# Altium PCB Tag.PcbDoc
Units mil, origin at the board's own origin, x right, y up, seen from the top; angles counter-clockwise.
Board outline 2028.76 x 1150.6 mil, 4 copper layers (Top Layer, GND, MID, Bottom Layer), stack 42.101 mil thick; 25 components, 15 nets, 94 pads, 50 vias.
Unrouted connection lines stored in the file: 1.
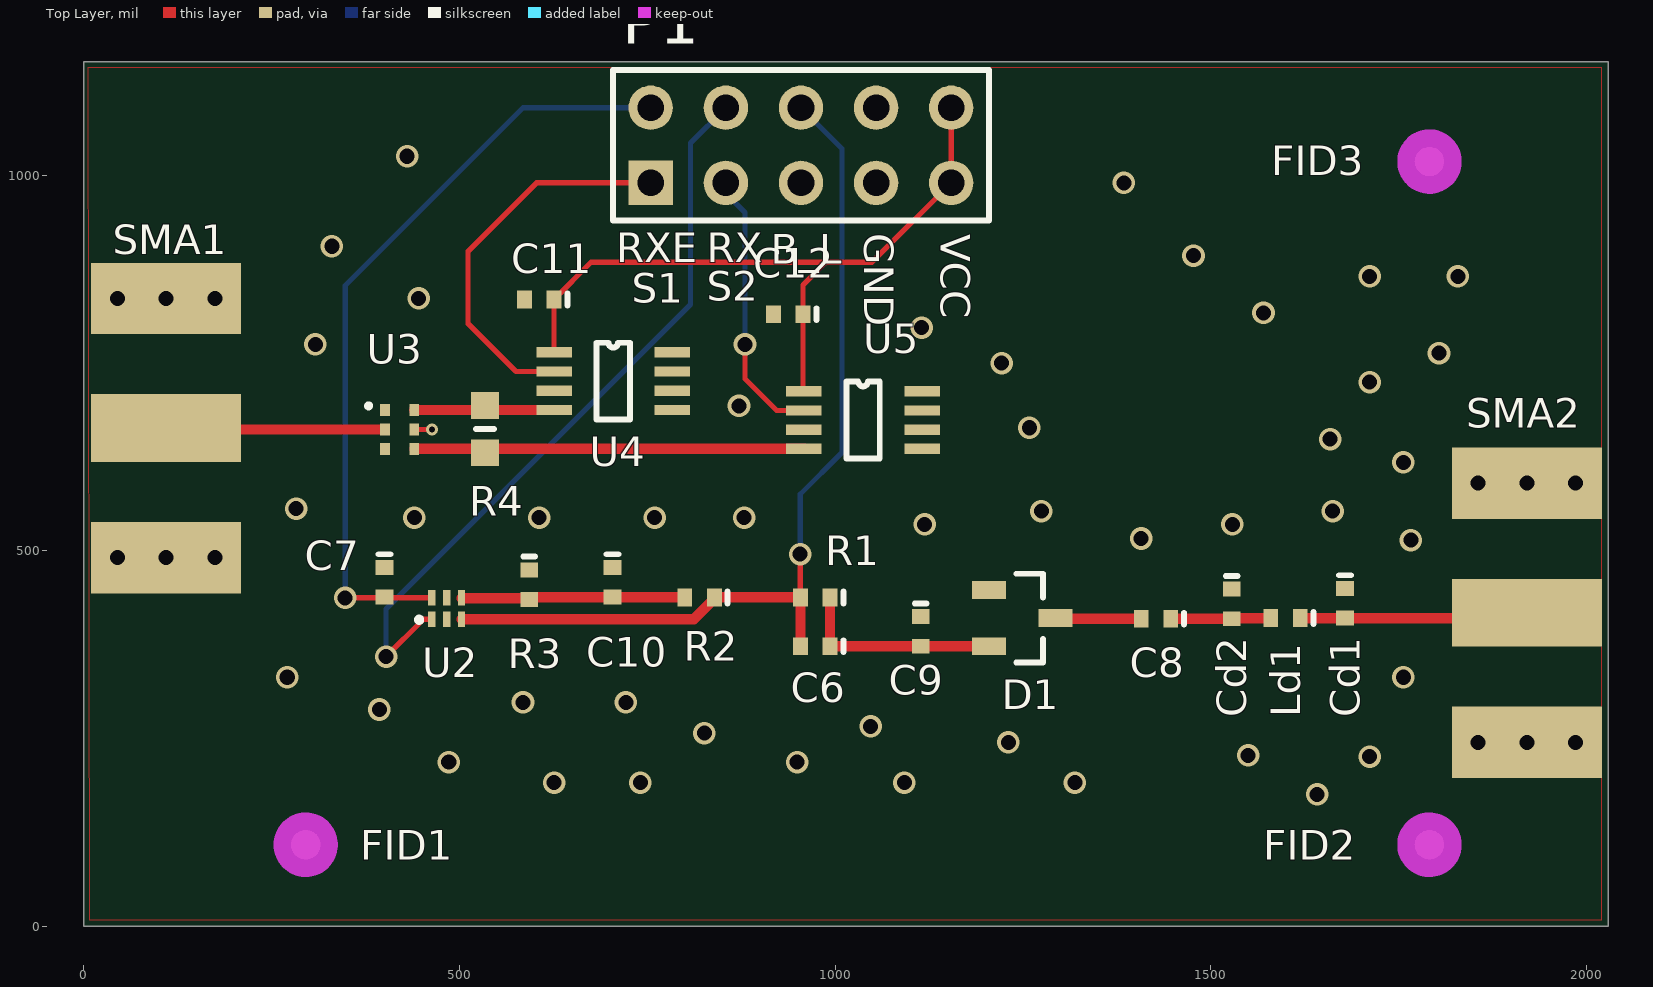
[diagram p0: Top Layer view]
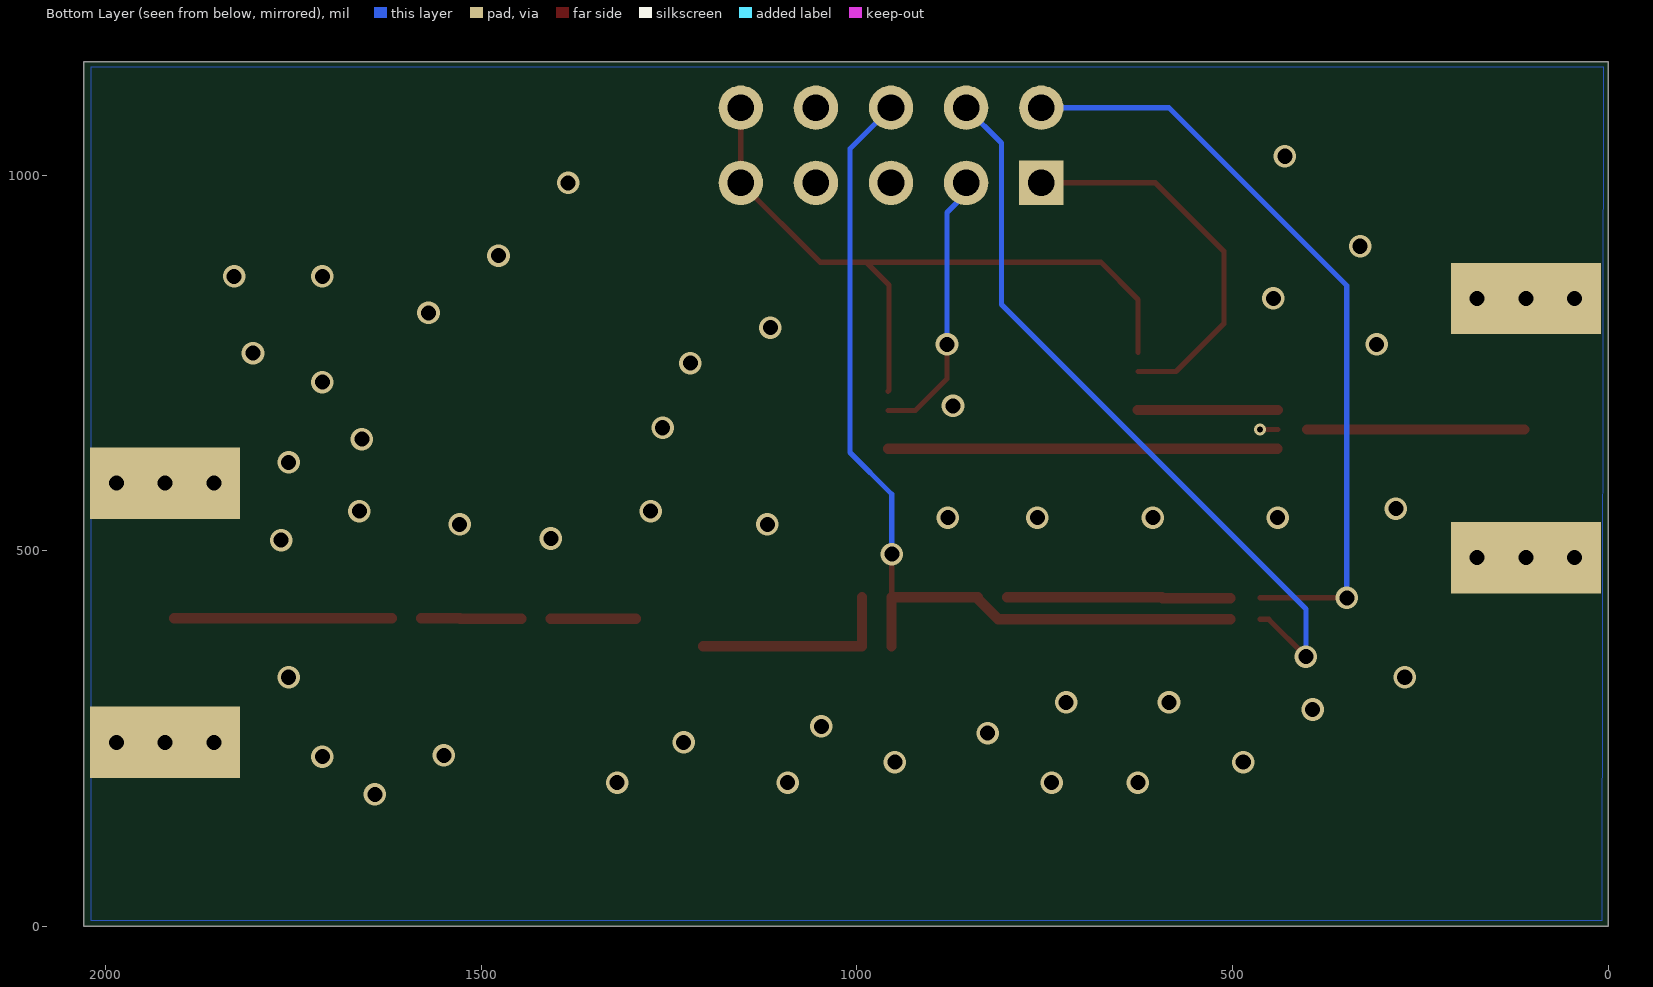
[diagram p1: Bottom Layer view, seen from below]

## Layer stack, top to bottom
Top Solder: solder mask 2, Solder Resist, Dk 3.5
Top Layer: signal copper 1.378
Dielectric 2: prepreg 4.016, PP, Dk 4.25
GND: signal copper 1.378
Dielectric 1: prepreg 28.557, TU768, Dk 4.45
MID: signal copper 1.378
Dielectric 3: prepreg 4.016, PP, Dk 4.25
Bottom Layer: signal copper 1.378
Bottom Solder: solder mask 2, Solder Resist, Dk 3.5

## Board outline
0,0 0,1150.6 2028.76,1150.6 2028.76,0

## Design rules (kind name [scope] priority, off if disabled: settings)
AssemblyTestPointUsage [All] p0: scope1count=1 scope1_0_kind=Board scope1_0_value=Board scope2count=1 scope2_0_kind=Board scope2_0_value=Board commentlength=0
AssemblyTestpoint [All] p0: scope1count=1 scope1_0_kind=Board scope1_0_value=Board scope2count=1 scope2_0_kind=Board scope2_0_value=Board commentlength=0
Clearance 信号线铺铜规则_1 [All] p0 off: scope1count=1 scope1_0_kind=Board scope1_0_value=Board scope2count=1 scope2_0_kind=NetClass scope2_0_value=RF2 commentlength=48 gap=16.25 // Protel DXP Scope 1 Expression Was: InPolygon
Clearance Clearance_1 [All] p0: scope1count=1 scope1_0_kind=Board scope1_0_value=Board scope2count=1 scope2_0_kind=Board scope2_0_value=Board commentlength=0 gap=5.9
Clearance 信号线铺铜规则 [All] p0 off: scope1count=1 scope1_0_kind=Board scope1_0_value=Board scope2count=1 scope2_0_kind=Board scope2_0_value=Board commentlength=48 gap=12 // Protel DXP Scope 1 Expression Was: InPolygon
Clearance Clearance_Keepouts [All] p0 off: scope1count=1 scope1_0_kind=Board scope1_0_value=Board scope2count=1 scope2_0_kind=Board scope2_0_value=Board commentlength=99 gap=0 // Protel DXP Scope 2 Expression Was: ((IsTrack Or IsArc) And Not InPoly) And IsFree and IsKeepOut
Clearance 信号线铺铜规则 [InPolygon] p1: gap=12 ignorepadtopadclearanceinfootprint=FALSE
Clearance 信号线铺铜规则_1 [InPolygon vs InNetClass('RF2')] p2: gap=16.25 ignorepadtopadclearanceinfootprint=FALSE
Clearance Clearance_Keepouts [((IsTrack Or IsArc) And Not InPoly) And IsFree and IsKeepOut vs ((IsTrack Or IsArc) And Not InPoly) And IsFree and IsKeepOut] p3: gap=0 ignorepadtopadclearanceinfootprint=FALSE
Clearance Clearance_1 [All] p4: gap=5.9 ignorepadtopadclearanceinfootprint=FALSE except(0: Arc-SMDPad Track-SMDPad)
ComponentClearance [All] p0: scope1count=1 scope1_0_kind=Board scope1_0_value=Board scope2count=1 scope2_0_kind=Board scope2_0_value=Board commentlength=0 gap=10 collisioncheckmode=3
DiffPairsRouting [All] p0: scope1count=1 scope1_0_kind=Board scope1_0_value=Board scope2count=1 scope2_0_kind=Board scope2_0_value=Board commentlength=0
FabricationTestPointUsage [All] p0: scope1count=1 scope1_0_kind=Board scope1_0_value=Board scope2count=1 scope2_0_kind=Board scope2_0_value=Board commentlength=0 valid=0 allowmultiple=FALSE
FabricationTestpoint [All] p0: scope1count=1 scope1_0_kind=Board scope1_0_value=Board scope2count=1 scope2_0_kind=Board scope2_0_value=Board commentlength=0 side=3 testpointundercomponent=TRUE minsize=40 maxsize=100 preferedsize=60 minholesize=0 maxholesize=40 preferedholesize=32 testpointgrid=1
FanoutControl Fanout_Default [All] p0: scope1count=1 scope1_0_kind=Board scope1_0_value=Board scope2count=1 scope2_0_kind=Board scope2_0_value=Board commentlength=30 // Fanout_Default (Default Rule)
FanoutControl Fanout_Small [All] p0 off: scope1count=1 scope1_0_kind=Board scope1_0_value=Board scope2count=1 scope2_0_kind=Board scope2_0_value=Board commentlength=84 // Protel DXP Scope 1 Expression Was: (CompPinCount < 5)   Fanout_Small (Default Rule)
FanoutControl Fanout_SOIC [All] p0 off: scope1count=1 scope1_0_kind=Board scope1_0_value=Board scope2count=1 scope2_0_kind=Board scope2_0_value=Board commentlength=71 // Protel DXP Scope 1 Expression Was: IsSOIC   Fanout_SOIC (Default Rule)
FanoutControl Fanout_LCC [All] p0 off: scope1count=1 scope1_0_kind=Board scope1_0_value=Board scope2count=1 scope2_0_kind=Board scope2_0_value=Board commentlength=69 // Protel DXP Scope 1 Expression Was: IsLCC   Fanout_LCC (Default Rule)
FanoutControl Fanout_BGA [All] p0 off: scope1count=1 scope1_0_kind=Board scope1_0_value=Board scope2count=1 scope2_0_kind=Board scope2_0_value=Board commentlength=69 // Protel DXP Scope 1 Expression Was: IsBGA   Fanout_BGA (Default Rule)
Height [All] p0: scope1count=1 scope1_0_kind=Board scope1_0_value=Board scope2count=1 scope2_0_kind=Board scope2_0_value=Board commentlength=0
HoleSize [All] p0: scope1count=1 scope1_0_kind=Board scope1_0_value=Board scope2count=1 scope2_0_kind=Board scope2_0_value=Board commentlength=0 absolutevalues=TRUE maxlimit=100 minlimit=1 maxpercent=80.000 minpercent=20.000
HoleToHoleClearance [All] p0: scope1count=1 scope1_0_kind=Board scope1_0_value=Board scope2count=1 scope2_0_kind=Board scope2_0_value=Board commentlength=0
LayerPairs [All] p0: scope1count=1 scope1_0_kind=Board scope1_0_value=Board scope2count=1 scope2_0_kind=Board scope2_0_value=Board commentlength=0 enforce=TRUE
MinimumSolderMaskSliver [All] p0: scope1count=1 scope1_0_kind=Board scope1_0_value=Board scope2count=1 scope2_0_kind=Board scope2_0_value=Board commentlength=0
MinimumSolderMaskSliver [All] p1: minsoldermaskwidth=4
NetAntennae [All] p0: scope1count=1 scope1_0_kind=Board scope1_0_value=Board scope2count=1 scope2_0_kind=Board scope2_0_value=Board commentlength=0
PasteMaskExpansion [All] p0: scope1count=1 scope1_0_kind=Board scope1_0_value=Board scope2count=1 scope2_0_kind=Board scope2_0_value=Board commentlength=0 expansion=0
PlaneClearance [All] p0: scope1count=1 scope1_0_kind=Board scope1_0_value=Board scope2count=1 scope2_0_kind=Board scope2_0_value=Board commentlength=0 clearance=20
PlaneConnect [All] p0: scope1count=1 scope1_0_kind=Board scope1_0_value=Board scope2count=1 scope2_0_kind=Board scope2_0_value=Board commentlength=0 planeconnectstyle=Relief reliefexpansion=20 reliefentries=4 reliefconductorwidth=10 reliefairgap=10
PolygonConnect [All] p0: scope1count=1 scope1_0_kind=Board scope1_0_value=Board scope2count=1 scope2_0_kind=Board scope2_0_value=Board commentlength=0 connectstyle=Direct reliefconductorwidth=10 reliefentries=4 polygonreliefangle="90 Angle"
PolygonConnect [All] p1: connectstyle=Direct reliefconductorwidth=10 reliefentries=4 polygonreliefangle="90 Angle" airgapwidth=10
RoutingCorners [All] p0: scope1count=1 scope1_0_kind=Board scope1_0_value=Board scope2count=1 scope2_0_kind=Board scope2_0_value=Board commentlength=0 cornerstyle=45-Degree minsetback=100 maxsetback=100
RoutingLayers [All] p0: scope1count=1 scope1_0_kind=Board scope1_0_value=Board scope2count=1 scope2_0_kind=Board scope2_0_value=Board commentlength=0 top layer=Automatic mid layer 1=Automatic mid layer 2=Automatic bottom layer=Automatic
RoutingPriority [All] p0: scope1count=1 scope1_0_kind=Board scope1_0_value=Board scope2count=1 scope2_0_kind=Board scope2_0_value=Board commentlength=0
RoutingTopology [All] p0: scope1count=1 scope1_0_kind=Board scope1_0_value=Board scope2count=1 scope2_0_kind=Board scope2_0_value=Board commentlength=0 topology=Shortest
RoutingVias [All] p0: scope1count=1 scope1_0_kind=Board scope1_0_value=Board scope2count=1 scope2_0_kind=Board scope2_0_value=Board commentlength=0 holewidth=20 width=50 viastyle="Through Hole" minholewidth=15 minwidth=30 maxholewidth=28 maxwidth=50
RoutingVias [All] p1: holewidth=20 width=50 viastyle="Through Hole" minholewidth=15 minwidth=30 maxholewidth=28 maxwidth=50
ShortCircuit [All] p0: scope1count=1 scope1_0_kind=Board scope1_0_value=Board scope2count=1 scope2_0_kind=Board scope2_0_value=Board commentlength=0 allowed=FALSE
SilkToBoardRegionClearance [All] p0: scope1count=1 scope1_0_kind=Board scope1_0_value=Board scope2count=1 scope2_0_kind=Board scope2_0_value=Board commentlength=0
SilkToSilkClearance [All] p0: scope1count=1 scope1_0_kind=Board scope1_0_value=Board scope2count=1 scope2_0_kind=Board scope2_0_value=Board commentlength=0
SilkToSilkClearance [All] p1: silktosilkclearance=3.94
SilkToSolderMaskClearance [All] p0 off: scope1count=1 scope1_0_kind=Board scope1_0_value=Board scope2count=1 scope2_0_kind=Board scope2_0_value=Board commentlength=44 // Protel DXP Scope 1 Expression Was: IsPad
SilkToSolderMaskClearance [IsPad] p1: minsilkscreentomaskgap=3.94 clearancetoexposedcopper=TRUE
SolderMaskExpansion [All] p0: scope1count=1 scope1_0_kind=Board scope1_0_value=Board scope2count=1 scope2_0_kind=Board scope2_0_value=Board commentlength=0 expansion=4
SolderMaskExpansion [All] p1: expansion=4 istentingtop=FALSE
UnRoutedNet [All] p0: scope1count=1 scope1_0_kind=Board scope1_0_value=Board scope2count=1 scope2_0_kind=Board scope2_0_value=Board commentlength=0
UnpouredPolygon [All] p0: scope1count=1 scope1_0_kind=Board scope1_0_value=Board scope2count=1 scope2_0_kind=Board scope2_0_value=Board commentlength=0
Width Width_RF_1 [All] p0: scope1count=1 scope1_0_kind=NetClass scope1_0_value=RF1 scope2count=1 scope2_0_kind=Board scope2_0_value=Board commentlength=0 maxlimit=10 minlimit=6.5 preferedwidth=6.5
Width Width_RF_2 [All] p0: scope1count=1 scope1_0_kind=NetClass scope1_0_value=RF2 scope2count=1 scope2_0_kind=Board scope2_0_value=Board commentlength=0 maxlimit=10 minlimit=6.5 preferedwidth=6.5
Width [All] p0: scope1count=1 scope1_0_kind=Board scope1_0_value=Board scope2count=1 scope2_0_kind=Board scope2_0_value=Board commentlength=0 maxlimit=39.37 minlimit=6.5 preferedwidth=7
Width Width_RF_2 [InNetClass('RF2')] p1: maxlimit=10 minlimit=6.5 preferedwidth=6.5 minimp=50.000000 maximp=50.000000 favimp=50.000000
Width Width_RF_1 [InNetClass('RF1')] p2: maxlimit=10 minlimit=6.5 preferedwidth=6.5 minimp=50.000000 maximp=50.000000 favimp=50.000000
Width [All] p3: maxlimit=39.37 minlimit=6.5 preferedwidth=7 midlayer1_maxwidth=10 midlayer2_maxwidth=10 bottomlayer_maxwidth=10 minimp=50.000000 maximp=50.000000 favimp=50.000000
27 further rules are at their usual default settings.

## Classes and differential pairs
component class U_SSBtag_ref: C11 C12 R4 U3 U4 U5
component class SSBtag_main: FID1 FID2 FID3 P1 SMA1 SMA2
component class U_SSBtag_afe: C6 C7 C8 C9 C10 Cd1 Cd2 D1 Ld1 R1 R2 R3 U2

## Components (designator, comment, footprint, x,y, rotation, side; value= is the part's Value field where it differs from the comment)
C6 "GCQ1555C1H330JB01D" 0402 973.43,372.87 r180 top
C7 "GCM155R71H103KA55D" 0402 400.2,457.91 r270 top
C8 "GCQ1555C1H1R0WB01D" 0402 1426.97,409.49 r180 top
C9 "GCQ1555C1H100FB01D" 0402 1113.78,392.56 r270 top
C10 "GCM1555C1H102JA16J" 0402 703.74,457.91 r270 top
C11 "GCM155R71H104KE02D" 0402 606.07,834.49 r180 top
C12 "GCM155R71H104KE02D" 0402 937.61,814.81 r180 top
Cd1 "GJM1555C1H1R0WB01D" 0402 1678.56,429.96 r270 top
Cd2 "GJM1555C1H1R0WB01D" 0402 1527.76,429.17 r270 top
D1 "SMS7630-005LF" SOT23 1248.82,410.27 r0 top
FID1 "Fiducial" Fiducial10-20#1 295.28,108.61 r0 top
FID2 "Fiducial" Fiducial10-20#2 1790.94,108.61 r0 top
FID3 "Fiducial" Fiducial10-20#3 1790.94,1017.94 r0 top
Ld1 "LQW15AN6N6G8ZD" 0402 1599.41,410.27 r180 top
P1 "Header 5X2" HDR2X5 754.45,989.59 r0 top
R1 "CRCW0402560KFKED" 0402 973.43,437.83 r180 top
R2 "CRCW040222K0FKEDC" 0402 819.5,437.83 r180 top
R3 "CRCW0402220KFKED" 0402 592.72,454.75 r270 top
R4 "CRCW0603100RFKEAC" RESC1608X55N 533.86,661.81 r270 top
SMA1 "SMA - Edge" "SMA - Edge - Wide" 209.45,663.25 r90 top
SMA2 "SMA - Edge" "SMA - Edge - Wide" 2020.64,417.36 r90 top
U2 "AZV3001FZ4-7" X2DFN1410-6 463.19,437.24 r0 top
U3 "PD2425J5050S2HF" PD2425J5050S2HF 420.28,661.27 r270 top
U4 "ADG902BRMZ" ADG902 625.88,764.02 r0 top
U5 "ADG902BRMZ" ADG902 958.35,712.25 r0 top

## Footprints (in the part's own frame and the unit in brackets; to place one, negate y for a bottom-side part, rotate by r counter-clockwise, add the part's x,y. Pads: shape width x height; smd on the part's side, far side on the other; paste and mask are expansions set on the pad)
0402 [mm] "Surface Mount; Body 1 x 0.5 mm (LxW typ)"
  rect 0.5x0.6 smd: 1(-0.5,0) 2(0.5,0)
  silkscreen extent -0.95,-0.2 -0.95,0.2
ADG902 [mm]
  rect 1.2x0.35 smd: 1(0,0) 2(0,-0.65) 3(0,-1.3) 4(0,-1.95) 5(4,-1.95) 6(4,-1.3) 7(4,-0.65) 8(4,0)
  silkscreen extent 1.43,-2.28 2.57,0.33
Fiducial10-20#1 [mm]
  round 1 smd mask+0: FID1(0,0)
  Top Layer keep-out circle w1.178: c0,0 r0.5
Fiducial10-20#2 [mm]
  round 1 smd mask+0: FID2(0,0)
  Top Layer keep-out circle w1.178: c0,0 r0.5
Fiducial10-20#3 [mm]
  round 1 smd mask+0: FID3(0,0)
  Top Layer keep-out circle w1.178: c0,0 r0.5
HDR2X5 [mm] "Connector; Header; 5x2 Position"
  rect 1.5x1.5 hole 0.9: 1(0,0)
  round 1.5 hole 0.9: 2(0,2.54) 3(2.54,0) 4(2.54,2.54) 5(5.08,0) 6(5.08,2.54) 7(7.62,0) 8(7.62,2.54) 9(10.16,0) 10(10.16,2.54)
  silkscreen extent -1.27,-1.27 11.43,3.81
PD2425J5050S2HF [mm]
  rect 0.41x0.33 smd: 1(-0.66,-0.495) 2(0,-0.495) 3(0.66,-0.495) 4(0.66,0.495) 5(0,0.495) 6(-0.66,0.495)
  silkscreen extent -0.85,-1.1 -0.75,-1
RESC1608X55N [mm]
  rect 0.9x0.95 smd: 1(-0.8,0) 2(0.8,0)
  silkscreen extent 0,-0.3 0,0.3
"SMA - Edge - Wide" [mil] "SMA - Board Edge Connector, Wide Body = .375in, no gnd pad"
  round 38 hole 20: 1(-172.5,35) 1(-172.5,100) 1(-172.5,165) 1(172.5,35) 1(172.5,100) 1(172.5,165)
  rect 95x200 smd: 1(-172.5,100) 1(172.5,100)
  rect 95x200 smd far side: 1(-172.5,100) 1(172.5,100)
  rect 90x200 smd: 2(0,100)
SOT23 [mm] "SOT23, 3-Leads, Body 2.9x1.3mm, Pitch 0.95mm, Lead Span 2.3mm - Reverse Pinning, IPC Medium Density"
  rect 1.15x0.6 smd: 1(-1.125,0.95) 2(-1.125,-0.95) 3(1.125,0)
  silkscreen extent -0.2,-1.5 0.7,1.5
X2DFN1410-6 [mm] "AZV3001FZ4-7 packaging"
  rect 0.25x0.525 smd: 1(0,-0.725) 2(0.5,-0.725) 3(1,-0.725) 4(1,0) 5(0.5,0) 6(0,0)
  silkscreen extent -0.48,-0.78 -0.39,-0.7

## Part data
C6 C7 C8 C9 C10 C11 C12 Cd1 Cd2: library part Cap, "Ceramic Capacitor (Surface Mount)"
D1: "Schottky Diode, Two in Series, Small Package SOT-23"
FID1 FID2 FID3: library part FID
Ld1: library part Ind, "Inductor (Surface Mount)"
P1: "Header, 5-Pin, Dual row"
R1 R2 R3: library part Res, "Chip Resistor (Surface Mount)"
R4: "Resistor"
SMA1 SMA2: "SMA - Board Edge Connector"
U3: "Integrated Circuit"
U4 U5: library part adg902

## Via types
v1: diameter 30, hole 20, Top Layer to Bottom Layer, 49 vias
v2: diameter 16, hole 8, Top Layer to Bottom Layer, 1 vias

## Nets (pads, with @x,y where several pads share a name; then routed paths per layer and width w, separated by ;. In a path a pad name is that pad's centre, name@x,y a point inside that pad or via, vN(x,y) a via of type N, cw(c..) or ccw(c..) an arc to the next point about the centre after c; other vN are vias at no path point)
BITLINE: C6.2 P1.6 R1.2 R2.1 U2.3 | length 1225
  Top Layer w7: v1(953.42,495.31) 953.58,495.15 953.58,437.99 R1.2
  Top Layer w13.75: U2.3 812.02,408.7 R2.1@839.19,435.87 ; R2.1 R1.2 C6.2
  Bottom Layer w7: v1(953.42,495.31) 953.42,575.18 1009.08,630.84 1009.08,1034.96 P1.6
BITLINE_LPF: C10.2 R2.2 R3.2 U2.4 | length 298.3
  Top Layer w7: U2.4 U2.4@503.15,436.65 ; R3.2@592.72,436.65 R3.2@594.29,438.23 ; C10.2 C10.2@704.14,437.83
  Top Layer w13.75: U2.4@503.15,436.65 R3.2@592.72,436.65 ; R3.2@594.29,438.23 C10.2 ; C10.2@704.14,437.83 R2.2
GND: C7.1 C9.1 C10.1 C11.2 C12.2 Cd1.1 Cd2.1 D1.1 P1.7 P1.8 R3.1 SMA1.1 SMA2.1 U2.2 U3.1 U3.3 U3.5 U4.3 U4.5 U4.6 U4.7 U4.8 U5.3 U5.5 U5.6 U5.7 U5.8 | length 23.4
  Top Layer w7: U3.5 v2(463.19,661.27)
  other v1: 1641.34,175.59 625.75,191.29 740.77,191.29 1091.96,191.29 1319.03,191.29 485.63,218.5 949.26,218.5 1711.42,225.98 1549.61,227.56 1230.58,244.86 825.98,257.09 1047.24,266.14 393.35,288.63 584.47,297.98 721.45,297.98 270.69,331.54 1756.16,331.54 1766.35,513.97 1407.29,516.21 1119.02,535.04 1528.55,535.04 439.77,544.04 606.07,544.04 759.65,544.04 878.72,544.04 1274.54,552.76 1662.2,552.76 282.55,556.06 1756.16,617.44 1658.87,648.47 1258.47,663.64 871.97,692.76 1711.42,724.36 1221.61,749.58 1803.67,762.93 308.01,774.74 1114.92,796.96 1570.06,816.68 445.67,835.75 1711.42,865.19 1828.65,865.19 1476.91,892.75 330.13,905.22 1384.25,989.59 430.23,1025.02
NetC6_1: C6.1 C9.2 D1.2 R1.1 | length 276.4
  Top Layer w13.75: R1.1 C6.1 C9.2 D1.2
NetC8_1: C8.1 Cd2.2 Ld1.2 | length 133.4
  Top Layer w7: Cd2.2 Cd2.2@1528.55,410.27
  Top Layer w13.75: C8.1 Cd2.2 ; Cd2.2@1528.55,410.27 Ld1.2
NetC8_2: C8.2 D1.3 | length 114.5
  Top Layer w7: D1.3 D1.3@1293.9,409.49
  Top Layer w13.75: D1.3@1293.9,409.49 C8.2
NetCd1_2: Cd1.2 Ld1.1 SMA2.2 | length 290
  Top Layer w7: Ld1.1 Ld1.1@1619.29,410.47
  Top Layer w13.75: Ld1.1 SMA2.2@1908.8,410.27
NetR4_1: R4.1 U3.6 U4.4 | length 186.1
  Top Layer w13.75: U3.6 U4.4
NetR4_2: R4.2 U3.4 U5.4 | length 518.7
  Top Layer w7: U3.4 U3.4@439.96,635.48
  Top Layer w13.75: U3.4@439.96,635.48 U5.4
NetSMA1_2: SMA1.2 U3.2 | length 292.2
  Top Layer w7: SMA1.2 SMA1.2@111.43,661.27
  Top Layer w13.75: SMA1.2@111.43,661.27 U3.2
RX: P1.4 U2.1 | length 999.4
  Top Layer w7: v1(402.21,359.07) 451.83,408.7 U2.1
  Bottom Layer w7: v1(402.21,359.07) 402.21,422.52 807.54,827.85 807.54,1042.69 P1.4
RX_EN: C7.2 P1.2 U2.6 | length 1036.2
  Top Layer w7: v1(347.85,437.24) 400,437.24 400.59,437.83 401.18,437.24 U2.6
  Bottom Layer w7: v1(347.85,437.24) 347.85,852.98 584.47,1089.59 P1.2
S1: P1.1 U4.2 | length 517.9
  Top Layer w7: U4.2 575.21,738.43 511.41,802.23 511.41,898.45 602.56,989.59 P1.1
S2: P1.3 U5.2 | length 367.1
  Top Layer w7: v1(879.95,774.74) 879.95,728.93 922.21,686.66 U5.2
  Bottom Layer w7: P1.3 854.45,975.51 879.95,950.01 v1(879.95,774.74)
VCC: C11.1 C12.1 P1.9 P1.10 U4.1 U5.1 | length 948.3
  Top Layer w7: U4.1 625.75,764.14 C11.1 675.33,884.07 987.68,884.07 ; U5.1 957.3,713.3 C12.1 957.3,853.69 987.68,884.07 ; P1.10 P1.9 1048.92,884.07 987.68,884.07
pads on no net: FID1.FID1 FID2.FID2 FID3.FID3 P1.5 U2.5

## Polygon pours and split planes (outlines as drawn)
GND on MID "GND_L03_P002" (solid, pour order 2): 5.92,1143.26 7.1,1143.26 2019.7,1143.26 2019.7,8.61 2019.7,8.22 2018.52,8.22 7.5,8.22
GND on GND "GND_L02_P005" (solid, pour order 5): 5.92,1143.26 7.1,1143.26 2019.7,1143.26 2019.7,8.61 2019.7,8.22 2018.52,8.22 7.5,8.22
GND on Bottom Layer "GND_L04_P006" (solid, pour order 6): 5.92,1143.26 7.1,1143.26 2019.7,1143.26 2019.7,8.61 2019.7,8.22 2018.52,8.22 7.5,8.22
GND on Top Layer "GND_L01_P004" (solid, pour order 4): 5.92,1143.26 7.1,1143.26 2019.7,1143.26 2019.7,8.61 2019.7,8.22 2018.52,8.22 7.5,8.22

## Silkscreen, mask and mechanical layers (free items; w line width, h text height)
Top Overlay:
  text "GND" at 1038.76,922.63 h39.37 r270
  text "VCC" at 1140.18,921.45 h39.37 r270
  text "RXE" at 708.54,884.07 h39.37
  text "RX" at 829.02,884.07 h39.37
  text "B_L" at 914.45,881.74 h39.37
  text "S2" at 829.02,832.36 h39.37
  text "S1" at 729.02,829.85 h39.37
Mechanical 1:
  circle w10: c1913.12,1040.02 r59.06
  circle w10: c104.35,107 r59.06
  circle w10: c1913.12,107 r59.06
  circle w10: c104.35,1040.02 r59.06
  lines w10: 0,0 2028.76,0 2028.76,1150.6 0,1150.6 0,0

## Text inside footprints (layer, text, board x,y; h text height)
U3: Mechanical 1 "Single Side-band Backscatter Tag 2-2" at 1723.24,96.34 h39.37